# EAGLE board MOL-v2-2 (EAGLE 8.2.2)

Size 138.77 x 49.34 mm. Coordinates in mm from the lower left corner, seen from the top.
Outline: 3.81,49.34 arc90 0,45.53 0,3.81 arc90 3.81,0 134.96,0 arc90 138.77,3.81 138.77,45.26 arc74 134.96,49.34 3.81,49.34
Copper layers (1*16): Top 0.035559375mm / dielectric 1.501140625mm / Bottom 0.035559375mm
Design rules "typical_4pcb *": minimum track width 10mil, minimum drill 15mil, track to track 6mil, track to pad 6mil, pad to pad 6mil, via to via 10mil, smd to smd 6mil, copper to edge 15mil, drill to drill 8mil, minimum pad ring 10mil, minimum via ring 8mil, stop-mask expansion 4mil, vias tented up to drill 0mil, thermal gap 10mil
Net classes: 2 Power: width 0.381 mm, clearance 0.279 mm; 3 Analog Sig: width 0.381 mm, clearance 0.279 mm
Holes 2.54 mm at 117.69,3.08 20.08,4.08

## Footprints (pad centres in the part's own frame; a part is rotated, then mirrored left to right if it is on the bottom)
1X03_LOCK@1 = drill 1.016 pad 1.88: 1 0,0.127; 2 2.54,-0.127; 3 5.08,0.127
2X5-SHROUDED_LOCK = drill 1.016 pad 1.88: 1 -1.397,5.08; 2 1.397,5.08; 3 -1.397,2.54; 4 1.397,2.54; 5 -1.397,0; 6 1.397,0; 7 -1.397,-2.54; 8 1.397,-2.54; 9 -1.397,-5.08; 10 1.397,-5.08
DCJACK_2MM_PTH = drill 2.8: GND 0,7.35; GNDBREAK 4.8,10.75 | drill 3.2: PWR 0,13.6
1X03_NO_SILK = drill 1.016 pad 1.524: 1 0,0; 2 2.54,0; 3 5.08,0
1X05_LOCK = drill 1.016 pad 1.88: 1 0,0.127; 2 2.54,-0.127; 3 5.08,0.127; 4 7.62,-0.127; 5 10.16,0.127
TRIM-PCB-9MM = drill 0.9 pad 1.778: 1 -2.54,-7.5; 2 0,-7.5; 3 2.54,-7.5 | drill 3.1 pad 4: M1 -4.8,0; M2 4.8,0; M3 0.2,5
LED3MM = drill 0.813 octagon: A -1.27,0; K 1.27,0
0204/7 = drill 0.813 octagon: 1 -3.81,0; 2 3.81,0
SO16 = smd 0.6 x 2.2: 1 -4.445,-2.6; 2 -3.175,-2.6; 3 -1.905,-2.6; 4 -0.635,-2.6; 5 0.635,-2.6; 6 1.905,-2.6; 7 3.175,-2.6; 8 4.445,-2.6; 9 4.445,2.6; 10 3.175,2.6; 11 1.905,2.6; 12 0.635,2.6; 13 -0.635,2.6; 14 -1.905,2.6; 15 -3.175,2.6; 16 -4.445,2.6
SWITCH_TR2-MOMENTARY-LED = drill 0.8 pad 1.676: 1 2.54,-2.54; 2 2.54,2.54; 3 -2.54,-2.54; 4 -2.54,2.54; A 0,2.54; C 0,-2.54 | hole 2.2: 2.53,0.05 | hole 1.2: -1.76,1.1; -1.76,-1.09
SWITCH_SPDT_500SSP1S2M2QEA = drill 1.65: 1 -4.7,0; 2 0,0; 3 4.7,0
TEENSY3-6_NO-USB-HOST = drill 1: 0 3.81,1.27; 1 6.35,1.27; 2 8.89,1.27; 3 11.43,1.27; 3V3(1) 36.83,1.27; 3V3(2) 46.99,6.35; 3V3(3) 6.35,16.51; 3V3(4) 59.69,11.43; 4 13.97,1.27; 5 16.51,1.27; 6 19.05,1.27; 7 21.59,1.27; 8 24.13,1.27; 9 26.67,1.27; 10 29.21,1.27; 11 31.75,1.27; 12 34.29,1.27; 13 34.29,16.51; 14 31.75,16.51; 15 29.21,16.51; 16 26.67,16.51; 17 24.13,16.51; 18 21.59,16.51; 19 19.05,16.51; 20 16.51,16.51; 21 13.97,16.51; 22 11.43,16.51; 23 8.89,16.51; 24 39.37,1.27; 25 41.91,1.27; 26 44.45,1.27; 27 46.99,1.27; 28 49.53,1.27; 29 52.07,1.27; 30 54.61,1.27; 31 57.15,1.27; 32 59.69,1.27; 33 59.69,16.51; 34 57.15,16.51; 35 54.61,16.51; 36 52.07,16.51; 37 49.53,16.51; 38 46.99,16.51; 39 44.45,16.51; 40 39.37,8.89; 41 41.91,8.89; 42 44.45,8.89; 43 49.53,8.89; 44 52.07,8.89; 45 54.61,8.89; 46 57.15,8.89; 47 57.15,11.43; 48 54.61,11.43; 49 52.07,11.43; 50 49.53,11.43; 51 44.45,11.43; 52 41.91,11.43; 53 39.37,11.43; 54 24.13,11.43; 55 21.59,11.43; 56 19.05,11.43; 57 16.51,11.43; A10 11.43,13.97; A11 13.97,13.97; AGND 3.81,16.51; AREF 8.89,13.97; DAC0 41.91,16.51; DAC1 39.37,16.51; DC 21.59,8.89; DD 24.13,8.89; DE 19.05,8.89; G1 46.99,8.89; G2 36.83,16.51; G3 59.69,8.89; G6 16.51,8.89; P 46.99,11.43; R 46.99,13.97; VBAT 46.99,3.81; VIN 1.27,16.51; VUSB 3.81,13.97 | drill 1 square: G0 1.27,1.27
SOIC20 = smd 0.6 x 1.5: 1 -5.715,-4.8; 2 -4.445,-4.8; 3 -3.175,-4.8; 4 -1.905,-4.8; 5 -0.635,-4.8; 6 0.635,-4.8; 7 1.905,-4.8; 8 3.175,-4.8; 9 4.445,-4.8; 10 5.715,-4.8; 11 5.715,4.8; 12 4.445,4.8; 13 3.175,4.8; 14 1.905,4.8; 15 0.635,4.8; 16 -0.635,4.8; 17 -1.905,4.8; 18 -3.175,4.8; 19 -4.445,4.8; 20 -5.715,4.8

## Placement (x,y rotation side)
J1  SERVO1  [1X03_LOCK@1]  125.41,32.94 270 top
J2  SERVO2  [1X03_LOCK@1]  127.99,32.99 270 top
J4  ACTUATORS  [2X5-SHROUDED_LOCK]  111.37,30.98 90 top
J5  POWER-5V  [DCJACK_2MM_PTH]  139.61,41.77 270 bottom
J6  AN5  [1X03_NO_SILK]  19.26,34.68 270 bottom
J7  AN6  [1X03_NO_SILK]  16.25,34.53 270 bottom
J8  AN7  [1X03_NO_SILK]  13.27,34.54 270 bottom
J9  AN8  [1X03_NO_SILK]  10.26,34.54 270 bottom
J10  JOY1  [1X05_LOCK]  1.89,24.02 90 bottom
J11  JOY2  [1X05_LOCK]  136.46,34.17 270 bottom
KNOB1  [TRIM-PCB-9MM]  10,18 180 top
KNOB2  [TRIM-PCB-9MM]  30,17.99 180 top
KNOB3  [TRIM-PCB-9MM]  107.99,17.01 180 top
KNOB4  [TRIM-PCB-9MM]  128.01,17 180 top
LED1  [LED3MM]  68.82,15.35 90 top
R1  330  [0204/7]  75.05,5.48 270 bottom
RN1  [SO16]  97.03,5.46 90 bottom
RN2  [SO16]  42.93,5.28 270 bottom
S1  SW-LEDPTH  [SWITCH_TR2-MOMENTARY-LED]  10,5 0 top
S2  SW-LEDPTH  [SWITCH_TR2-MOMENTARY-LED]  30,5 0 top
S3  SW-LEDPTH  [SWITCH_TR2-MOMENTARY-LED]  108,4 0 top
S4  SW-LEDPTH  [SWITCH_TR2-MOMENTARY-LED]  128,4 0 top
STRIP1  [2X5-SHROUDED_LOCK]  11.28,41.76 90 top
STRIP2  [2X5-SHROUDED_LOCK]  31.71,41.76 90 top
STRIP3  [2X5-SHROUDED_LOCK]  52.14,41.78 90 top
STRIP4  [2X5-SHROUDED_LOCK]  72.61,41.78 90 top
STRIP5  [2X5-SHROUDED_LOCK]  93.1,41.79 90 top
STRIP6  [2X5-SHROUDED_LOCK]  113.57,41.79 90 top
SW1  500SSP1S2M2QEA  [SWITCH_SPDT_500SSP1S2M2QEA]  68.8,6.48 270 top
TEENSY  TEENSY3_6-ALI_NO-USB-HOST  [TEENSY3-6_NO-USB-HOST]  99.9,18.34 0 bottom
U$1  A2982  [SOIC20]  85,6.76 90 bottom
U$2  A2982  [SOIC20]  53.94,6.7 270 bottom

## Library data of the parts
J1 J2 J6-J11 = SparkFun-Connectors
J4 STRIP1-STRIP6 = SparkFun-Connectors; PROD_ID: CONN-08671; SF_ID: PRT-08506
J5 = adafruit
KNOB1-KNOB4 S1-S4 TEENSY U$1 U$2 = CMU-ArtFab
LED1 = led
R1 = resistor
RN1 RN2 = resistor-bourns; OC_FARNELL: unknown; OC_NEWARK: unknown
SW1 = CMU-ArtFab; DIGIKEY: EG5137-ND

## Nets
+3V3: J4.9 J6.1 J7.1 J8.1 J9.1 J10.1 J11.1 KNOB1.1 KNOB2.1 KNOB3.1 KNOB4.1 STRIP1.9 STRIP2.9 STRIP3.9 STRIP4.9 STRIP5.9 STRIP6.9 TEENSY.3V3(1) TEENSY.3V3(2) TEENSY.3V3(3) TEENSY.3V3(4)
+5V [Power]: J1.2 J2.2 J4.7 J4.8 R1.2 SW1.1
AGND [Analog Sig]: J6.3 J7.3 J8.3 J9.3 J10.2 J11.2 KNOB1.3 KNOB2.3 KNOB3.3 KNOB4.3 STRIP1.8 STRIP2.8 STRIP3.8 STRIP4.8 STRIP5.8 STRIP6.8 TEENSY.AGND
AN1 [Analog Sig]: STRIP1.1 TEENSY.39
AN2 [Analog Sig]: STRIP1.2 TEENSY.DAC0
AN3 [Analog Sig]: STRIP2.1 TEENSY.DAC1
AN4 [Analog Sig]: STRIP2.2 TEENSY.15
AN5 [Analog Sig]: J6.2 STRIP3.1 TEENSY.18
AN6 [Analog Sig]: J7.2 STRIP3.2 TEENSY.19
AN7 [Analog Sig]: J8.2 STRIP4.1 TEENSY.20
AN8 [Analog Sig]: J9.2 STRIP4.2 TEENSY.21
AN9 [Analog Sig]: KNOB1.2 STRIP5.1 TEENSY.49
AN10 [Analog Sig]: KNOB2.2 STRIP5.2 TEENSY.50
AN11 [Analog Sig]: KNOB3.2 STRIP6.1 TEENSY.22
AN12 [Analog Sig]: KNOB4.2 STRIP6.2 TEENSY.23
B1: STRIP1.3 TEENSY.48
B2: STRIP1.4 TEENSY.51
B3: STRIP2.3 TEENSY.42
B4: STRIP2.4 TEENSY.52
B5: STRIP3.3 TEENSY.40
B6: STRIP3.4 TEENSY.28
B7: STRIP4.3 TEENSY.27
B8: STRIP4.4 TEENSY.26
B9: STRIP5.3 TEENSY.25
B10: STRIP5.4 TEENSY.24
B11: STRIP6.3 TEENSY.12
B12: STRIP6.4 TEENSY.11
B13: S1.3 TEENSY.13
B14: S2.3 TEENSY.54
B15: S3.3 TEENSY.56
B16: S4.3 TEENSY.1
GND: J1.1 J2.1 J4.10 J5.GND LED1.K S1.1 S1.C S2.1 S2.C S3.1 S3.C S4.1 S4.C STRIP1.10 STRIP2.10 STRIP3.10 STRIP4.10 STRIP5.10 STRIP6.10 TEENSY.G0 TEENSY.G1 TEENSY.G2 TEENSY.G3 TEENSY.G6 U$1.12 U$2.12
GNDBREAK: J5.GNDBREAK
JOYB1: J10.5 TEENSY.47
JOYB2: J11.5 TEENSY.44
JOYH1 [Analog Sig]: J10.3 TEENSY.A11
JOYH2 [Analog Sig]: J11.3 TEENSY.31
JOYV1 [Analog Sig]: J10.4 TEENSY.A10
JOYV2 [Analog Sig]: J11.4 TEENSY.32
LED1: STRIP1.7 TEENSY.43
LED2: STRIP2.7 TEENSY.41
LED3: STRIP3.7 TEENSY.53
LED4: STRIP4.7 TEENSY.0
LED5: STRIP5.7 TEENSY.55
LED6: STRIP6.7 TEENSY.57
M_AIN: J4.2 TEENSY.45
M_BIN: J4.4 TEENSY.46
M_PWMA: J4.1 TEENSY.36
M_PWMB: J4.3 TEENSY.35
N$1: J5.PWR SW1.2
N$2: LED1.A R1.1
N$11: RN1.8 U$1.13
N$12: RN1.7 U$1.14
N$13: RN1.6 U$1.15
N$14: RN1.5 U$1.16
N$15: RN1.4 U$1.17
N$16: RN1.3 U$1.18
N$17: RN1.2 U$1.19
N$18: RN1.1 U$1.20
N$19: RN2.1 U$2.20
N$20: RN2.2 U$2.19
N$21: RN2.3 U$2.18
N$22: RN2.4 U$2.17
N$23: RN2.5 U$2.16
N$24: RN2.6 U$2.15
N$25: RN2.7 U$2.14
N$26: RN2.8 U$2.13
PWM1: TEENSY.8 U$1.7
PWM2: TEENSY.9 U$1.8
PWM3: TEENSY.6 U$1.5
PWM4: TEENSY.7 U$1.6
PWM5: TEENSY.4 U$1.4
PWM6: TEENSY.5 U$1.3
PWM7: TEENSY.2 U$1.1
PWM8: TEENSY.3 U$1.2
PWM9: TEENSY.17 U$2.7
PWM10: TEENSY.10 U$2.8
PWM11: TEENSY.16 U$2.6
PWM12: TEENSY.14 U$2.5
PWM13: TEENSY.30 U$2.4
PWM14: TEENSY.29 U$2.3
PWM15: TEENSY.38 U$2.2
PWM16: TEENSY.37 U$2.1
PWM_1: RN2.9 STRIP1.5
PWM_2: RN2.10 STRIP1.6
PWM_3: RN2.11 STRIP2.5
PWM_4: RN2.12 STRIP2.6
PWM_5: RN2.13 STRIP3.5
PWM_6: RN2.14 STRIP3.6
PWM_7: RN2.15 STRIP4.5
PWM_8: RN2.16 STRIP4.6
PWM_9: RN1.9 STRIP5.5
PWM_10: RN1.10 STRIP5.6
PWM_11: RN1.12 STRIP6.5
PWM_12: RN1.11 STRIP6.6
PWM_13: RN1.13 S1.A
PWM_14: RN1.14 S2.A
PWM_15: RN1.15 S3.A
PWM_16: RN1.16 S4.A
S1: J1.3 J4.5 TEENSY.33
S2: J2.3 J4.6 TEENSY.34
V+: U$1.9 U$2.9

## Text on the board
tPlace: 2017 Ali Momeni / Made in PGH | MOL v2-2